# Altium PCB PCB2.PcbDoc (part 2 of 2)
Units mm, origin at the board's own origin, x right, y up, seen from the top; angles counter-clockwise.
Board outline 57.07 x 67 mm, 2 copper layers (Top Layer, Bottom Layer); 55 components, 52 nets, 263 pads, 110 vias.
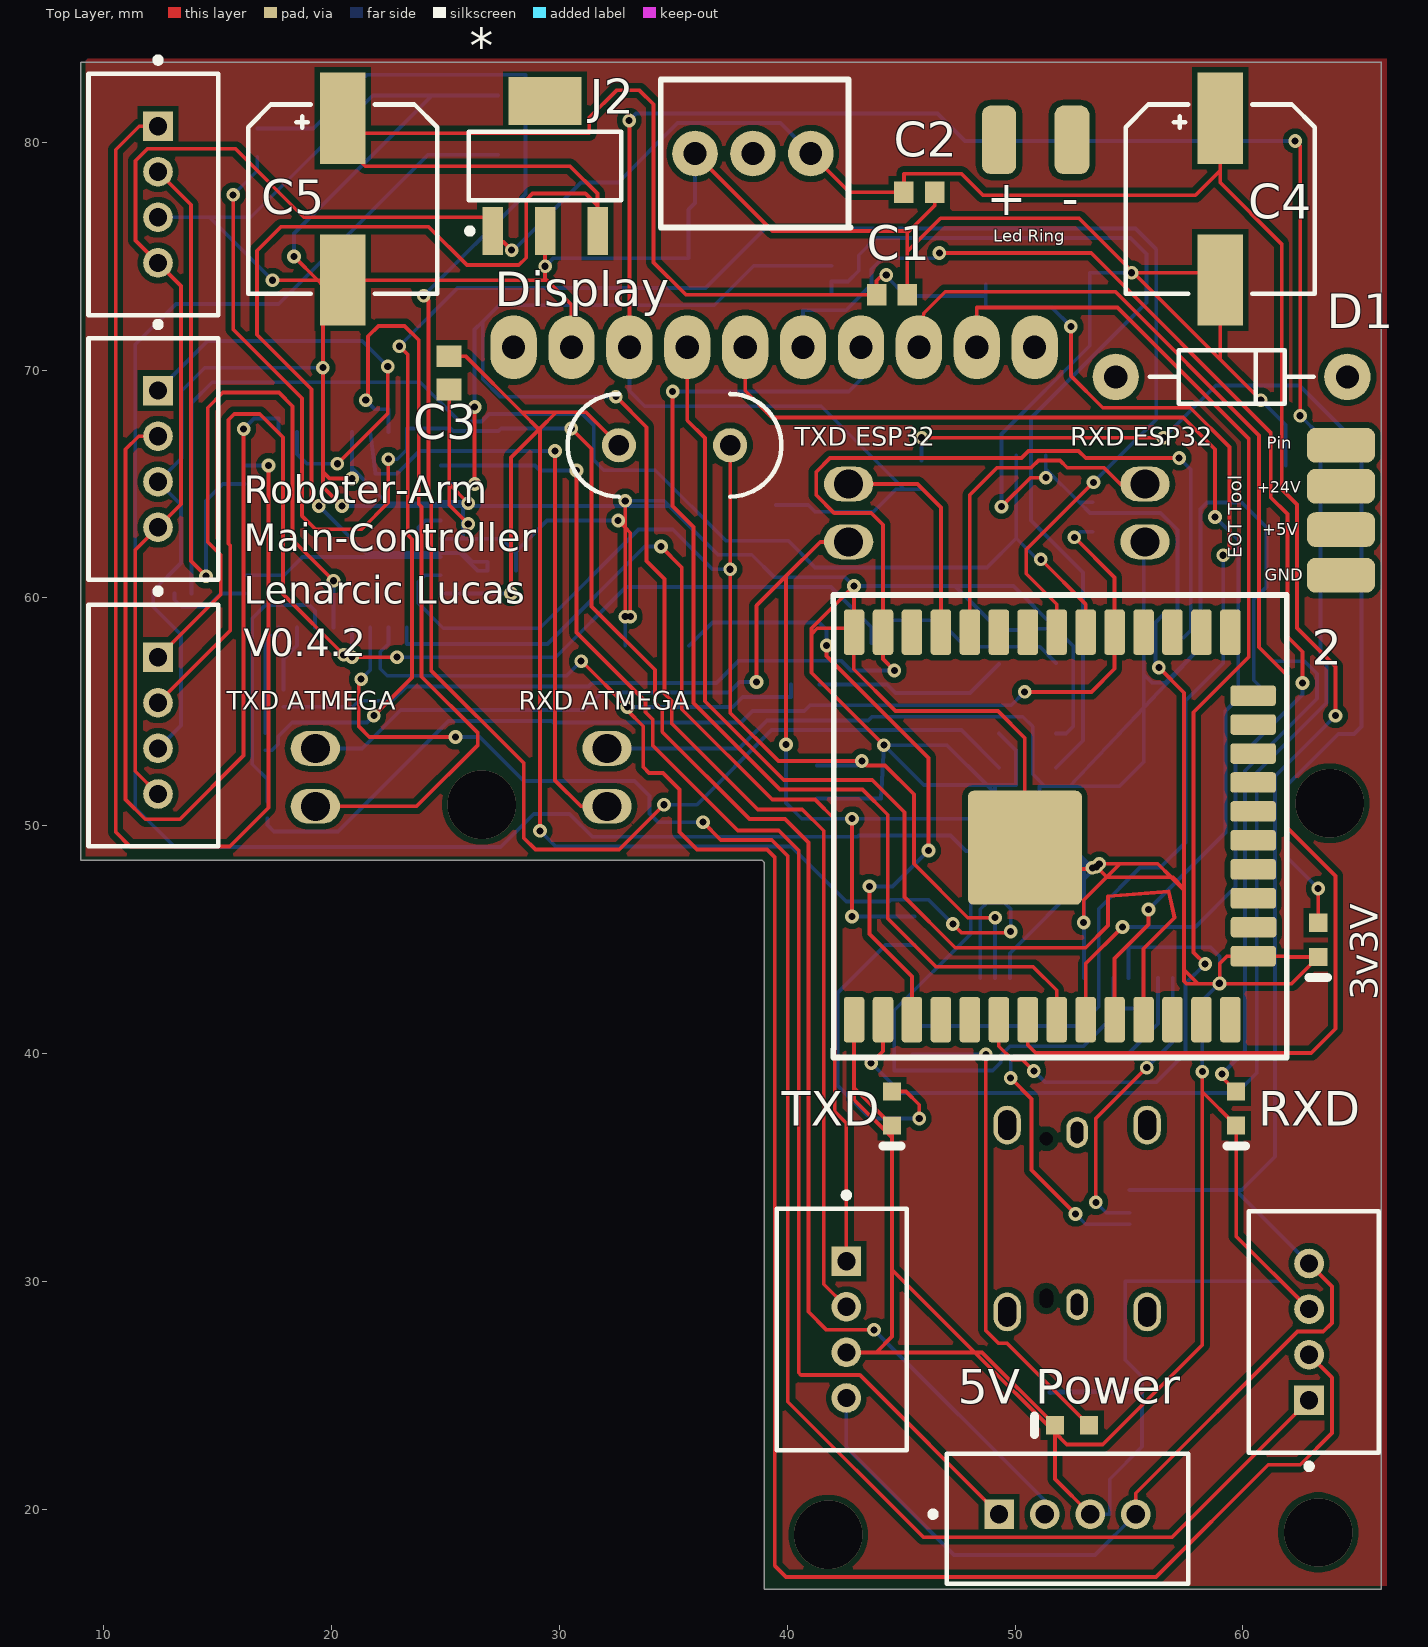
[diagram p0: Top Layer view]

## Via types
v1: diameter 0.6, hole 0.311, Top Layer to Bottom Layer, 106 vias
v2: diameter 3, hole 3, Top Layer to Bottom Layer, 4 vias

## Nets (pads, with @x,y where several pads share a name; then routed paths per layer and width w, separated by ;. In a path a pad name is that pad's centre, name@x,y a point inside that pad or via, vN(x,y) a via of type N, cw(c..) or ccw(c..) an arc to the next point about the centre after c; other vN are vias at no path point) (continued)
Step3: (continued)
  Top Layer w0.164: v1(30.963,57.226) 30.988,57.226 v1(32.995,55.22) 32.995,55.064 33.686,54.372 33.686,52.582 33.945,52.323 34.55,52.323 35.279,51.594 35.279,49.734 36.051,48.963 39.116,48.963 39.463,48.616 39.463,17.535 39.954,17.043 56.185,17.043 61.112,21.971 62.509,21.971 63.906,23.368 63.906,25.794 J?.2@62.9,26.8
  Bottom Layer w0.164: U2.10 22.507,57.996 22.149,57.637 22.149,56.896 22.46,56.585 30.321,56.585 v1(30.963,57.226) ; v1(32.995,55.22) 37.617,55.22 38.049,55.651 40.175,55.651 R12.2
Step4: ?.2@12.4,55.4 R14.2 U2.12 | length 55.5
  Top Layer w0.164: ?.2@12.4,55.4 15.57,58.57 15.57,62.306 15.494,62.382 15.494,67.818 15.748,68.072 16.867,68.072 17.883,67.056 17.883,60.172 v1(20.549,57.506) ; v1(20.907,57.404) v1(22.885,57.404)
  Bottom Layer w0.164: v1(20.549,57.506) 20.907,57.864 ; v1(20.907,57.404) 20.907,57.864 ; U2.12 20.907,57.864 ; v1(22.885,57.404) 29.845,57.404 32.927,60.486 41.927,60.486 43.688,58.725 43.688,58.029 R14.2
Step5: J?.2@12.4,78.7 U2.23 | length 23.9
  Top Layer w0.164: J?.2@12.4,78.7 13.843,77.257 13.843,61.62 v1(14.503,60.96)
  Bottom Layer w0.164: v1(14.503,60.96) 14.503,64.264 15.24,65 U2.23
Step6: ?.2@12.4,67.1 U2.25 | length 40.4
  Top Layer w0.164: ?.2@12.4,67.1 11.55,67.1 10.973,66.523 10.973,51.156 11.836,50.292 13.36,50.292 16.154,53.086 v1(16.154,67.412)
  Bottom Layer w0.164: v1(16.154,67.412) 16.614,67.871 17.688,67.871 U2.25
TXD: "TXD ATMEGA.2" "TXD ESP32.1" R2.2 U1.1 | length 54.9
  Top Layer w0.164: v1(38.659,56.312) 38.659,59.665 39.954,60.96 ; v1(39.954,53.569) 39.954,60.96 ; 42.7,62.46 41.454,62.46 39.954,60.96 ; v1(42.85,46.025) v1(42.85,50.317)
  Bottom Layer w0.164: 19.3,53.4 21.361,53.4 23.045,55.084 31.092,55.084 31.864,55.856 37.453,55.856 37.91,56.312 v1(38.659,56.312) ; v1(39.954,53.569) 39.954,51.003 40.64,50.317 v1(42.85,50.317) 48.475,50.317 U1.1 ; v1(42.85,46.025) R2.2
VCCIO: C7.1 U1.4 U1.17 U1.19 | length 109
  Bottom Layer w0.164: C7.1 24.248,79.45 17.696,72.898 13.183,72.898 11.405,71.12 11.405,50.8 13.132,49.073 27.432,49.073 28.88,50.521 30.455,50.521 31.446,49.529 43.095,49.529 43.147,49.581 47.168,49.581 47.854,48.895 50.013,48.895 ; U1.4 50.425,49.307 50.013,48.895 ; U1.19 54.325,42.271 ; U1.17 55.625,41.986 54.61,41.986 54.325,42.271 ; 50.013,48.895 48.057,46.939 48.057,45.263 44.704,41.91 44.704,39.268 49.022,39.268 49.378,39.624 49.378,39.929 49.784,40.335 53.004,40.335 54.325,41.656 54.325,42.271
Vin: *.1 ?.4 C2.2 C4.1 J1.B9 J2.3 J?.4 | length 178.9
  Top Layer w0.164: ?.4@12.4,51.4 11.405,52.395 11.405,62.105 12.4,63.1 13.411,64.111 13.411,73.689 12.4,74.7 11.414,75.686 11.414,79.181 11.938,79.705 15.799,79.705 18.796,76.708 27.082,76.708 *.1 27.082,75.616 27.559,75.616 v1(27.915,75.26) ; J2.3 42.74,77.8 C2.2 45.125,78.613 47.65,78.613 48.59,77.673 57.912,77.673 59,78.761 ; ?.4@55.3,19.8 55.3,20.723 62.39,27.813 63.525,27.813 63.906,28.194 63.906,29.794 J?.4@62.9,30.8 ; C4.1 59,78.761 ; v1(64.059,54.837) 64.059,56.998 62.372,58.684 62.372,64.1 61.697,64.775 61.697,75.535 59,78.232 59,78.761
  Bottom Layer w0.164: v1(27.915,75.26) 27.991,75.26 30.963,78.232 32.588,78.232 35.192,80.836 39.704,80.836 J2.3 ; ?.4@42.6,24.9 42.6,22.733 47.324,18.009 53.509,18.009 ?.4@55.3,19.8 ; J1.B9 59.675,34.025 ; J?.4@62.9,30.8 59.675,34.025 ; v1(64.059,54.837) 61.403,52.181 61.403,35.484 59.944,34.025 59.675,34.025
pads on no net: 2.4 2.5 2.12 2.13 2.14 2.16 2.17 2.18 2.19 2.20 2.21 2.22 2.23 2.24 2.26 2.27 2.28 2.32 2.33 2.36 *.4 D1.1 D1.2 Display.0 Display.9 J1. J1.0 J1.A1 J1.A2 J1.A3 J1.A4 J1.A5 J1.A6 J1.A7 J1.A8 J1.A9 J1.A10 J1.A11 J1.A12 J1.B2 J1.B3 J1.B4 J1.B5 J1.B8 J1.B10 J1.B11 J1.B12 J2.2 U1.3 U1.6 U1.8 U1.9 U1.10 U1.11 U1.12 U1.13 U1.14 U1.22@52.375,43.325 U1.23 U1.24 U1.25 U2.19 U2.20 U2.21 U2.22 U2.28
copper on no net: | length 3.6
  Bottom Layer w0.254: 51.55,25.15 55.1,25.2
  other v2: 41.8,18.9 63.3,19 26.6,50.925 63.8,51

## Polygon pours and split planes (outlines as drawn)
no net on Bottom Layer "NONET_L02_P001" (solid, pour order 1): 39.127,16.613 66.202,16.613 66.202,83.612 9.127,83.612 9.127,48.613 39.127,48.613
no net on Top Layer "NONET_L01_P000" (solid, pour order 0): 9.227,83.667 66.302,83.666 66.302,16.667 39.227,16.667 39.227,48.667 9.227,48.667

## Silkscreen, mask and mechanical layers (free items; w line width, h text height)
Top Overlay:
  text "+" at 48.754,76.8 h1.52
  text "-" at 52.054,76.792 h1.52
  text "Led Ring" at 49.054,75.629 h0.52
  text "Pin" at 61.054,66.554 h0.52
  text "+24V" at 60.62,64.62 h0.5
  text "Roboter-Arm" at 16.154,64.154 h1.22
  text "+5V" at 60.854,62.754 h0.52
  text "Main-Controller" at 16.154,62.054 h1.22
  text "EOT Tool" at 59.946,61.754 h0.6 r90
  text "GND" at 60.954,60.754 h0.52
  text "Lenarcic Lucas" at 16.154,59.754 h1.22
  text "V0.4.2" at 16.154,57.454 h1.22
Outline:
  lines w1.2: 8.4,47.9 8.4,84.1 66.7,84.1 66.7,15.9 38.5,15.9 38.5,47.9 8.4,47.9